# Altium PCB SensorNode.PcbDoc (part 2 of 2)
Units mil, origin at the board's own origin, x right, y up, seen from the top; angles counter-clockwise.
Board outline 2244.09 x 2204.72 mil, 4 copper layers (Top Copper, POWER, GND, Bottom Copper), stack 61.811 mil thick; 83 components, 70 nets, 369 pads, 414 vias.
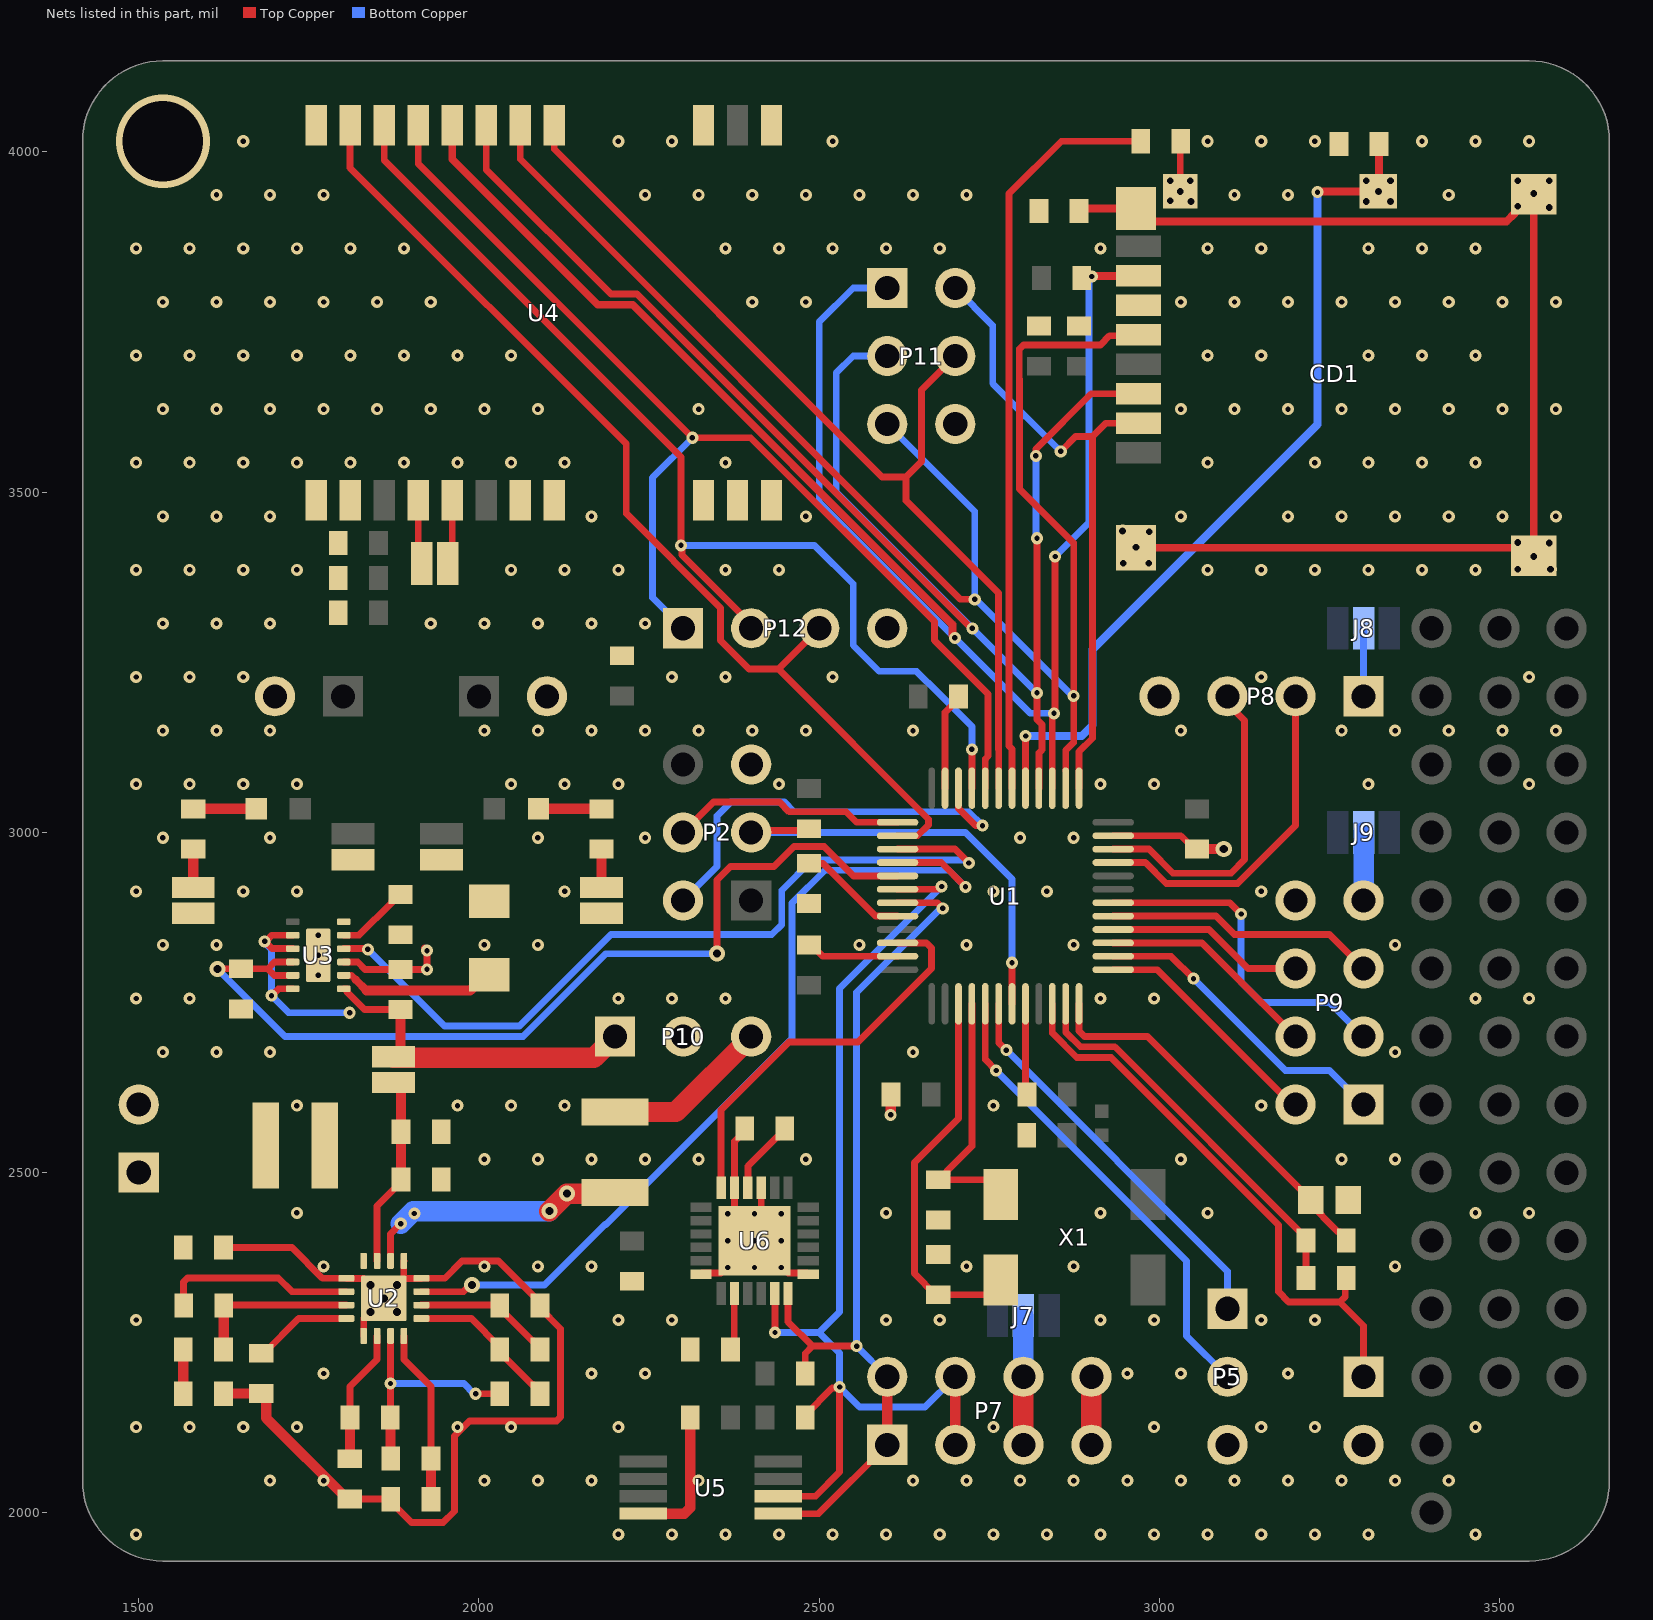
[diagram p4: the nets of this part, all layers, seen from the top]

## Via types
v1: diameter 17.72, hole 7.87, Top Copper to Bottom Copper, tented both sides, 344 vias
v2: diameter 19.68, hole 9.84, Top Copper to Bottom Copper, tented both sides, 25 vias
v3: diameter 23.62, hole 11.81, Top Copper to Bottom Copper, tented both sides, 22 vias
v4: diameter 19.68, hole 7.87, Top Copper to Bottom Copper, tented both sides, 12 vias
v5: diameter 19.68, hole 11.81, Top Copper to Bottom Copper, tented both sides, 5 vias
v6: diameter 137.8, hole 118.11, Top Copper to Bottom Copper, tented both sides, 4 vias
v7: diameter 39, hole 20, Top Copper to Bottom Copper, tented both sides, 1 vias
v8: diameter 30, hole 15, Top Copper to Bottom Copper, tented both sides, 1 vias

## Nets (pads, with @x,y where several pads share a name; then routed paths per layer and width w, separated by ;. In a path a pad name is that pad's centre, name@x,y a point inside that pad or via, vN(x,y) a via of type N, cw(c..) or ccw(c..) an arc to the next point about the centre after c; other vN are vias at no path point) (continued)
GND: C1.1 C2.1 C3.1 C4.1 C5.1 C6.1 C7.1 C8.1 C9.1 C10.1 C11.1 C12.1 C13.1 C14.1 C15.1 C16.1 C17.1 C18.1 C19.1 C20.1 C21.1 C22.1 C32.1 C33.1 CD1.6 J1.1 J2.1 P1.2 P2.5 P3.2 P4.2 P5.3 P6.2 P7.7 P7.8 P8.4 P9.8 P10.2 P11.6 P12.4 R2.1 R4.1 R6.1 R10.1 R12.1 R15.1 R18.1 R19.1 R22.1 U1.8 U1.23 U1.35 U1.47 U2.1 U2.5 U2.12 U2.13 U2.17@1860.12,2315.16 U3.3 U3.13 U4.1 U4.2 U4.3 U4.4 U4.5 U4.10 U4.11 U4.12 U4.20 U4.22 U5.4 U6.1 U6.9 U6.11 U6.18 U6.25 | length 3094.6
  Top Copper w10: C8.1@1624.53,2390 1725,2390 1770.32,2344.68 U2.1@1805,2344.68 1805.08,2344.61 1830.67,2344.61 v5(1840.43,2334.84) v5(1860.12,2315.16) ; U3.3@1801.16,2809.53 1801.24,2809.45 1821.81,2809.45 1832.6,2798.66 C11.1@1884.84,2798.66 v1(1923.66,2798.66) v1(1923.66,2826.34) v1@1920,2830 ; R10.1@1810,2020.47 1870,2020.47 R12.1@1870.47,2020 1870.47,2016.06 1900.92,1985.61 1947.37,1985.61 1964.09,2002.33 1964.09,2112.88 1986.21,2135 2114.14,2135 2120,2140.86 2120,2270.59 2089.53,2301.06 2089.53,2308.94 2028.46,2370 1975,2370 1949.68,2344.68 U2.12@1915.24,2344.68 1915.16,2344.61 U2.17@1889.57,2344.61 ; U2.5@1830.59,2260.04 1830.67,2260.12 1830.67,2285.71 v5(1840.43,2295.47) v5(1860.12,2315.16) ; U2.13@1889.65,2370.28 1889.57,2370.2 U2.17@1889.57,2344.61 ; U6.18@2326.26,2350.79 2328.06,2352.58 2355.61,2352.58 2403.03,2400 v4(2405,2400) ; C18.1@2390.47,2565 2390.47,2561.06 2375.47,2546.06 U6.11@2375.47,2477.76 2375.47,2429.53 v4(2405,2400) ; U6.9@2414.84,2477.76 2414.84,2409.84 v4(2405,2400) ; U6.1@2483.74,2350.79 2481.95,2352.58 2454.39,2352.58 2406.97,2400 v4(2405,2400) ; C33.1@2485,2834.53 2488.94,2834.53 2505.51,2817.95 U1.47@2615.12,2817.95 ; U1.35@2685,3065 2685,3176.54 2704.53,3196.06 C4.1@2704.53,3200 ; U1.8@2803.11,2748.07 2803.19,2747.99 C6.1@2803.19,2615 ; U1.23@2932.05,2995.12 3031.42,2995.12 3051.06,2975.47 C3.1@3055,2975.47 ; v5(1860.12,2315.16) v5(1879.8,2334.84) U2.17@1889.57,2344.61
  Top Copper w15: R4.1@1624.53,2175 1624.76,2175.24 1679.76,2175.24 C12.1@1680,2175.47 1681.06,2175.47 1687.34,2169.19 1687.34,2139.19 1806.06,2020.47 R10.1@1810,2020.47 ; U5.4@2241.18,1998.82 2301.69,1998.82 2310.47,2007.61 C17.1@2310.47,2145 ; v1(2605,2585) 2605,2614.53 C2.1@2605.47,2615 ; C6.1@2805.24,2612.95 2803.19,2615 C6.1@2805.47,2615 ; C3.1@3055,2975.47 v3(3094.53,2975.47) v3@3095,2975
  Top Copper w30: P7.7@2900,2100 P7.8@2900,2200
  other v1: 1496.06,1968.51 2204.73,1968.51 2283.47,1968.51 2362.21,1968.51 2440.95,1968.51 2519.69,1968.51 2598.43,1968.51 2677.17,1968.51 2755.91,1968.51 2834.65,1968.51 2913.39,1968.51 2992.13,1968.51 3070.87,1968.51 3149.61,1968.51 3228.35,1968.51 3307.09,1968.51 3464.57,1968.51 1692.91,2047.25 1771.65,2047.25 2007.88,2047.25 2086.62,2047.25 2165.36,2047.25 2322.84,2047.25 2637.8,2047.25 2716.54,2047.25 2795.28,2047.25 2874.02,2047.25 2952.76,2047.25 3031.5,2047.25 3110.24,2047.25 3188.98,2047.25 3267.72,2047.25 3346.46,2047.25 3425.2,2047.25 1496.06,2125.99 1574.8,2125.99 1653.54,2125.99 1732.28,2125.99 1968.51,2125.99 2047.25,2125.99 2204.73,2125.99 2755.91,2125.99 2992.13,2125.99 3149.61,2125.99 3228.35,2125.99 3464.57,2125.99 1771.65,2204.73 2165.36,2204.73 2244.1,2204.73 2952.76,2204.73 3031.5,2204.73 3188.98,2204.73 1496.06,2283.47 2204.73,2283.47 2283.47,2283.47 2598.43,2283.47 2677.17,2283.47 2913.39,2283.47 2992.13,2283.47 3149.61,2283.47 3228.35,2283.47 1771.65,2362.21 2007.88,2362.21 2086.62,2362.21 2165.36,2362.21 2716.54,2362.21 2874.02,2362.21 3346.46,2362.21 1732.28,2440.95 2598.43,2440.95 2913.39,2440.95 3070.87,2440.95 3464.57,2440.95 3543.31,2440.95 2007.88,2519.69 2086.62,2519.69 2165.36,2519.69 2244.1,2519.69 2322.84,2519.69 2480.32,2519.69 3031.5,2519.69 3267.72,2519.69 3346.46,2519.69 1732.28,2598.43 1968.51,2598.43 2047.25,2598.43 2125.99,2598.43 2755.91,2598.43 3149.61,2598.43 1535.43,2677.17 1614.17,2677.17 1692.91,2677.17 2637.8,2677.17 3346.46,2677.17 1496.06,2755.91 1574.8,2755.91 2204.73,2755.91 2283.47,2755.91 2362.21,2755.91 2913.39,2755.91 2992.13,2755.91 3464.57,2755.91 3543.31,2755.91 1535.43,2834.65 1614.17,2834.65 2007.88,2834.65 2086.62,2834.65 2559.06,2834.65 2716.54,2834.65 2874.02,2834.65 3346.46,2834.65 1496.06,2913.39 1653.54,2913.39 1732.28,2913.39 2125.99,2913.39 2755.91,2913.39 2834.65,2913.39 3149.61,2913.39 1535.43,2992.13 1692.91,2992.13 2086.62,2992.13 2244.1,2992.13 2795.28,2992.13 2874.02,2992.13 1496.06,3070.87 1574.8,3070.87 1653.54,3070.87 1732.28,3070.87 2047.25,3070.87 2125.99,3070.87 2204.73,3070.87 2440.95,3070.87 2913.39,3070.87 2992.13,3070.87 3307.09,3070.87 3543.31,3070.87 1535.43,3149.61 1614.17,3149.61 1692.91,3149.61 2007.88,3149.61 2086.62,3149.61 2165.36,3149.61 2244.1,3149.61 2322.84,3149.61 2401.58,3149.61 2480.32,3149.61 2637.8,3149.61 3031.5,3149.61 3267.72,3149.61 3346.46,3149.61 3425.2,3149.61 3503.94,3149.61 3582.68,3149.61 1496.06,3228.35 1574.8,3228.35 1653.54,3228.35 2283.47,3228.35 2362.21,3228.35 2519.69,3228.35 3149.61,3228.35 3543.31,3228.35 1535.43,3307.09 1614.17,3307.09 1692.91,3307.09 1929.13,3307.09 2007.88,3307.09 2086.62,3307.09 2165.36,3307.09 2244.1,3307.09 1496.06,3385.83 1574.8,3385.83 1653.54,3385.83 1732.28,3385.83 2047.25,3385.83 2125.99,3385.83 2204.73,3385.83 2362.21,3385.83 2440.95,3385.83 3070.87,3385.83 3149.61,3385.83 3228.35,3385.83 3307.09,3385.83 3385.83,3385.83 3464.57,3385.83 1535.43,3464.57 1614.17,3464.57 1692.91,3464.57 2165.36,3464.57 2480.32,3464.57 3031.5,3464.57 3188.98,3464.57 3267.72,3464.57 3346.46,3464.57 3425.2,3464.57 3503.94,3464.57 3582.68,3464.57 1496.06,3543.31 1574.8,3543.31 1653.54,3543.31 1732.28,3543.31 1811.02,3543.31 1889.76,3543.31 1968.51,3543.31 2047.25,3543.31 2125.99,3543.31 2362.21,3543.31 3070.87,3543.31 3228.35,3543.31 3307.09,3543.31 3385.83,3543.31 3464.57,3543.31 1535.43,3622.05 1614.17,3622.05 1692.91,3622.05 1771.65,3622.05 1850.39,3622.05 1929.13,3622.05 2007.88,3622.05 2086.62,3622.05 2322.84,3622.05 3031.5,3622.05 3110.24,3622.05 3188.98,3622.05 3267.72,3622.05 3346.46,3622.05 3425.2,3622.05 3503.94,3622.05 3582.68,3622.05 1496.06,3700.79 1574.8,3700.79 1653.54,3700.79 1732.28,3700.79 1811.02,3700.79 1889.76,3700.79 1968.51,3700.79 2047.25,3700.79 3070.87,3700.79 3149.61,3700.79 3307.09,3700.79 3385.83,3700.79 3464.57,3700.79 1535.43,3779.53 1614.17,3779.53 1692.91,3779.53 1771.65,3779.53 1850.39,3779.53 1929.13,3779.53 2401.58,3779.53 2480.32,3779.53 3031.5,3779.53 3110.24,3779.53 3188.98,3779.53 3267.72,3779.53 3346.46,3779.53 3425.2,3779.53 3503.94,3779.53 3582.68,3779.53 1496.06,3858.27 1574.8,3858.27 1653.54,3858.27 1732.28,3858.27 1811.02,3858.27 1889.76,3858.27 2362.21,3858.27 2440.95,3858.27 2519.69,3858.27 2598.43,3858.27 2677.17,3858.27 2913.39,3858.27 3070.87,3858.27 3149.61,3858.27 3307.09,3858.27 3385.83,3858.27 3464.57,3858.27 1614.17,3937.01 1692.91,3937.01 1771.65,3937.01 2244.1,3937.01 2322.84,3937.01 2401.58,3937.01 2480.32,3937.01 2559.06,3937.01 2637.8,3937.01 2716.54,3937.01 3110.24,3937.01 3188.98,3937.01 3425.2,3937.01 1653.54,4015.75 2204.73,4015.75 2283.47,4015.75 2519.69,4015.75 3070.87,4015.75 3149.61,4015.75 3228.35,4015.75 3385.83,4015.75 3464.57,4015.75 3543.31,4015.75
  other v4: 2365.63,2360.63 2405,2360.63 2444.37,2360.63 2365.63,2400 2444.37,2400 2365.63,2439.37 2405,2439.37 2444.37,2439.37 1763.76,2789.84 1763.76,2819.37 1763.76,2848.9
  other v5: 1879.8,2295.47
  other v6: 1535.43,4015.75
GPIO_0: P5.1 U1.6 | length 587.4
  Top Copper w10: U1.6@2763.74,2748.07 2763.74,2691.26 v1(2775,2680)
  Bottom Copper w10: v1(2775,2680) 3100,2355 P5.1@3100,2300
GPIO_1: P5.2 U1.5 | length 695.5
  Top Copper w10: U1.5@2744.06,2748.07 2744.06,2665.94 v1(2760,2650)
  Bottom Copper w10: v1(2760,2650) 3040,2370 3040,2260 P5.2@3100,2200
I2C_SCL: P7.3 P7.4 R23.1 U1.42 U5.6 U6.23 | length 1612.7
  Top Copper w10: U6.23@2434.53,2322.24 2435,2321.77 v1(2435,2265) ; U5.6@2440,2024.41 2494.41,2024.41 2530,2060 v1(2530,2185) ; R23.1@2479.53,2140 2479.53,2143.94 2519.11,2183.52 2528.52,2183.52 v1@2529.48,2184.48 ; U1.42@2615.12,2916.38 2675.83,2916.38 v1(2680,2920.55)
  Top Copper w15: P7.3@2700,2100 P7.4@2700,2200
  Bottom Copper w10: v1(2435,2265) 2500,2265 ; v1(2680,2920.55) 2530,2770.55 2530,2295 2500,2265 ; P7.4@2700,2200 2655.47,2155.47 2559.53,2155.47 v1(2530,2185) 2530,2235 2500,2265
I2C_SDA: P7.1 P7.2 R24.1 U1.43 U5.5 U6.24 | length 1334.6
  Top Copper w10: U5.5@2440,1998.82 2498.82,1998.82 P7.1@2600,2100 ; U6.24@2454.21,2322.24 2454.21,2280.79 2490,2245 ; R24.1@2479.53,2205 2479.53,2234.53 2490,2245 ; v1(2555,2245) 2490,2245 ; U1.43@2615.12,2896.69 2673.31,2896.69 2680,2890 v1(2681.59,2888.41)
  Top Copper w15: P7.1@2600,2100 P7.2@2600,2200
  Bottom Copper w10: P7.2@2600,2200 v1(2555,2245) 2555,2765 2678.41,2888.41 v1(2681.59,2888.41)
I2C_VCC: J7.2 P7.5 P7.6 | length 190
  Top Copper w30: P7.5@2800,2100 P7.6@2800,2200
  Bottom Copper w30: P7.6@2800,2200 J7.2@2800,2290
LORA_BUSY: P12.2 U1.33 U4.14 | length 1643.9
  Top Copper w10: U4.14@1860.63,4039.37 1860.63,3987.91 2296.87,3551.67 v1(2296.87,3421.87) 2298.35,3420.39 2298.35,3407.87 2400,3306.21 P12.2@2400,3300 ; U1.33@2724.37,3065 v1(2724.41,3122.05) v1(2724.41,3122.05)
  Bottom Copper w10: v1(2296.87,3421.87) 2493.13,3421.87 2550,3365 2550,3275 2588.23,3236.77 2643.23,3236.77 2675,3205 2724.41,3155.59 v1(2724.41,3122.05)
LORA_IRQ: P12.3 U1.38 U4.13 | length 1542.6
  Top Copper w10: U4.13@1810.63,4039.37 1810.63,3976.77 2216.54,3570.87 2216.54,3468.46 2355,3330 2355,3282.03 2397.03,3240 2440,3240 ; P12.3@2500,3300 2440,3240 ; U1.38@2615.12,2995.12 2644.72,2995.12 2660.66,3011.05 2660.66,3019.34 2440,3240
LORA_nCS: P11.4 U1.31 U4.19 | length 1472.9
  Top Copper w10: U4.19@2110.63,4039.37 2110.63,4004.37 2592.5,3522.5 2627.5,3522.5 ; P11.4@2700,3700 2650.31,3650.31 2650.31,3545.31 2627.5,3522.5 ; U1.31@2763.74,3065 2763.74,3121.23 2763.27,3121.7 2763.27,3351.73 2627.5,3487.5 2627.5,3522.5
LORA_nRST: P12.1 U1.32 U4.15 | length 1696
  Top Copper w10: U4.15@1910.63,4039.37 1910.63,3983.01 v1(2313.64,3580) 2398.94,3580 2669.29,3309.65 2669.29,3282.29 2748.27,3203.31 2748.27,3112.16 2744.06,3107.95 U1.32@2744.06,3065
  Bottom Copper w10: P12.1@2300,3300 2255,3345 2255,3521.36 v1(2313.64,3580)
NetC7_2: C7.2 J5.1 L1.2 U3.5 | length 110.1
  Top Copper w10: U3.5@1801.16,2848.9 1823.9,2848.9 1872.13,2897.13 1872.13,2899.88 1880.91,2908.66 C7.2@1884.84,2908.66
NetC9_2: C9.2 C10.2 J4.1 U2.15 | length 262.8
  Top Copper w10: U2.15@1850.28,2370.28 1850.28,2450.87 1885.47,2486.06 C9.2@1885.47,2490
  Top Copper w15: C9.2@1885.47,2490 C10.2@1885.47,2560 J4.1@1885.47,2618.51
NetC12_2: C12.2 U2.4 | length 146.2
  Top Copper w10: C12.2@1680,2234.53 1683.94,2234.53 1735.04,2285.63 U2.4@1805,2285.63
NetC18_2: C18.2 U6.10 | length 111.4
  Top Copper w10: U6.10@2395.16,2477.76 2395.16,2509.49 2437.95,2552.28 2440.75,2552.28 2449.53,2561.06 C18.2@2449.53,2565
NetC19_2: C19.2 U6.20 | length 84.7
  Top Copper w10: C19.2@2369.53,2240 2375,2245.47 2375,2321.77 U6.20@2375.47,2322.24
NetC21_2: C21.2 U1.3 X1.1 | length 572.4
  Top Copper w10: U1.3@2704.68,2748.07 2704.68,2579.68 2640,2515 2640,2351.54 2671.06,2320.47 C21.2@2675,2320.47 2746.14,2320.47 2766.73,2341.06 X1.1@2766.73,2342.01
NetC22_2: C22.2 U1.4 X1.4 | length 378.6
  Top Copper w10: C22.2@2675,2489.53 C22.2@2678.94,2489.53 ; U1.4@2724.37,2748.07 2724.37,2538.9 2687.72,2502.24 2687.72,2498.31 C22.2@2678.94,2489.53 ; X1.4@2766.73,2467.99 2766.73,2468.94 2746.14,2489.53 C22.2@2678.94,2489.53
NetCD1_9: CD1.9 R17.2 | length 74
  Top Copper w10: CD1.9@3030.51,3942.13 3030.51,4014.76 R17.2@3031.5,4015.75
  other v2: 3046.26,3927.17 3015.75,3928.15 3030.51,3941.93 3015.75,3957.68 3045.28,3957.68
NetCD1_10: CD1.10 R19.2 U1.29 | length 1262.1
  Top Copper w10: U1.29@2803.11,3065 v1@2803.15,3136.77
  Top Copper w11.55: v1@2803.15,3136.77 2803.39,3137.01 v1(2803.39,3141.77) ; v1(3232.28,3940.94) 3233.46,3942.13 CD1.10@3321.85,3942.13 3322.83,3943.11 R19.2@3322.83,4011.81
  Bottom Copper w11.55: v1(2803.39,3141.77) 2885.87,3141.77 2901.57,3157.48 2901.57,3268.7 3232.28,3599.41 v1(3232.28,3940.94)
  other v2: 3304.13,3927.17 3339.57,3927.17 3321.85,3941.93 3304.13,3957.68 3339.57,3957.68
NetCD1_11: CD1.11 CD1.12 CD1.13 CD1.14 R18.2 | length 1817.7
  Top Copper w11.55: R18.2@2881.89,3913.39 2885.24,3916.73 CD1.14@2965.55,3916.73 2984.65,3897.64 3509.84,3897.64 3522.51,3910.3 3522.51,3914.24 3546.26,3937.99 CD1.11@3550.2,3937.99 CD1.12@3550.2,3406.5 3538.39,3418.31 CD1.13@2965.55,3418.31
  other v2: 3526.57,3386.81 3574.8,3386.81 2946.85,3395.67 2984.25,3395.67 3550.2,3405.51 2965.55,3419.29 3572.83,3425.2 3526.57,3426.18 2985.24,3441.93 2945.87,3442.91 3572.83,3918.31 3526.57,3920.28 3550.2,3938.98 3526.57,3957.68 3572.83,3957.68
NetD1_1: D1.1 R13.2 | length 92.7
  Top Copper w15: R13.2@1580,3034.53 1580.24,3034.76 1672.28,3034.76 D1.1@1672.52,3035
NetD2_1: D2.1 R14.2 | length 92.7
  Top Copper w15: D2.1@2087.48,3035 2087.72,3034.76 2179.76,3034.76 R14.2@2180,3034.53
NetF1_1: F1.1 P10.3 | length 246
  Top Copper w30: F1.1@2200,2589.06 2289.06,2589.06 P10.3@2400,2700
NetJ1_2: J1.2 R13.1 | length 56.5
  Top Copper w15: J1.2@1580,2919 R13.1@1580,2975.47
NetJ2_2: J2.2 R14.1 | length 56.5
  Top Copper w15: J2.2@2180,2919 R14.1@2180,2975.47
NetJ3_1: J3.1 U4.8 | length 84.8
  Top Copper w10: J3.1@1910.63,3403.44 U4.8@1910.63,3488.19
NetJ3_2: J3.2 U4.7 | length 95.9
  Top Copper w10: J3.2@1954,3395 1960.63,3401.63 U4.7@1960.63,3488.19
NetJ6_1: J6.1 U3.6
NetJ8_2: J8.2 P8.1 | length 100
  Bottom Copper w10: P8.1@3300,3200 J8.2@3300,3300
NetJ9_2: J9.2 P9.7 | length 100
  Bottom Copper w30: P9.7@3300,2900 J9.2@3300,3000
NetL1_1: L1.1 U3.2 | length 232.6
  Top Copper w10: U3.2@1801.16,2789.84 1812.52,2789.84 1818.9,2783.46
  Top Copper w12: 1818.9,2783.46 1834.65,2767.72
  Top Copper w15: 1834.65,2767.72 1986.93,2767.72 2010.08,2790.87 L1.1@2015,2790.87
NetL2_2: L2.2 U2.16
NetP1_1: P1.1 R20.1 U1.10 | length 850.1
  Top Copper w10: U1.10@2842.48,2748.07 2842.56,2747.99 2842.56,2705.02 2878.48,2669.1 2929.1,2669.1 3175,2423.2 3175,2325 3190,2310 3265,2310 ; R20.1@3274.53,2345 3273.14,2343.61 3273.14,2318.14 3265,2310 ; P1.1@3300,2200 3300,2275 3265,2310
NetP8_2: P8.2 U1.21 | length 505.9
  Top Copper w10: U1.21@2932.05,2955.75 2979.25,2955.75 3010,2925 3115,2925 3200,3010 P8.2@3200,3200
NetP8_3: P8.3 U1.22 | length 466.3
  Top Copper w10: U1.22@2932.05,2975.43 2984.57,2975.43 3020,2940 3105,2940 3125,2960 3125,3164.61 3100,3189.61 P8.3@3100,3200
NetP9_1: P9.1 U1.14 | length 458.2
  Top Copper w10: U1.14@2932.05,2817.95 3017.05,2817.95 v1(3050,2785)
  Bottom Copper w10: v1(3050,2785) 3185,2650 3250,2650 P9.1@3300,2600
NetP9_2: P9.2 U1.13 | length 350.1
  Top Copper w10: U1.13@2932.05,2798.27 2996.73,2798.27 3195,2600 P9.2@3200,2600
NetP9_3: P9.3 U1.18 | length 508
  Top Copper w10: U1.18@2932.05,2896.69 3103.31,2896.69 v1(3120,2880)
  Bottom Copper w10: v1(3120,2880) 3120,2780 3150,2750 3250,2750 P9.3@3300,2700
NetP9_4: P9.4 U1.15 | length 325
  Top Copper w10: U1.15@2932.05,2837.64 3062.36,2837.64 P9.4@3200,2700
NetP9_5: P9.5 U1.17 | length 399.9
  Top Copper w10: U1.17@2932.05,2877.01 3082.99,2877.01 3110,2850 3250,2850 P9.5@3300,2800
NetP9_6: P9.6 U1.16 | length 291.7
  Top Copper w10: U1.16@2932.05,2857.32 3072.68,2857.32 3130,2800 P9.6@3200,2800
NetR2_2: R2.2 U1.44 | length 162.2
  Top Copper w10: R2.2@2485,2954.53 2505.47,2954.53 2582.91,2877.09 2615.04,2877.09 U1.44@2615.12,2877.01
NetR3_1: R3.1 R5.2 U2.3 | length 245.3
  Top Copper w10: R3.1@1625,2305 1625.31,2305.31 U2.3@1805,2305.31
  Top Copper w15: R5.2@1624.53,2240 1624.76,2240.24 1624.76,2304.76 R3.1@1625,2305
NetR4_2: R4.2 R5.1 | length 65
  Top Copper w15: R4.2@1565.47,2175 R5.1@1565.47,2240
NetR6_2: R6.2 U1.41 U3.10 U3.11 | length 1394.6
  Top Copper w10: v3@1615,2800 v3(1615.47,2799.53) R6.2@1650,2799.53 1689.53,2799.53 ; U3.10@1721.52,2809.55 1699.55,2809.55 1689.53,2799.53 ; U3.10@1721.54,2809.53 U3.10@1726.36,2809.53 ; U3.11@1726.36,2789.84 1699.21,2789.84 1689.53,2799.53 ; v3(2350,2821.75) 2350,2930.27 2369.73,2950 2433.42,2950 2462.73,2979.31 2507.27,2979.31 2550.52,2936.06 U1.41@2615.12,2936.06
  Bottom Copper w10: v3(1615.47,2799.53) 1715,2700 2065,2700 2186.75,2821.75 v3(2350,2821.75)
NetR7_2: R7.2 R8.2 R9.2 U2.7 | length 347.3
  Top Copper w10: R7.2@1869.53,2140 1869.88,2140.35 1869.88,2259.96 U2.7@1869.96,2260.04 ; v1(1995,2175) R8.2@2030.47,2175
  Top Copper w15: R7.2@1869.53,2140 1870,2139.53 1870,2080.47 R9.2@1870.47,2080
  Bottom Copper w10: v1(1870,2190) 1977.91,2190 1992.91,2175 v1(1995,2175)
NetR17_1: R17.1 U1.30 | length 1101
  Top Copper w10: U1.30@2783.43,3065 2783.43,3122.76 2779.12,3127.06 2779.12,3939.12 2855.75,4015.75 R17.1@2972.44,4015.75
NetR20_2: R20.2 R21.2 U1.11 | length 553.5
  Top Copper w10: U1.11@2862.24,2722.56 2862.24,2706.54 2883.79,2685 2934.41,2685 3215.47,2403.94 R21.2@3215.47,2400 R20.2@3215.47,2345
NetR21_1: R21.1 R22.2 U1.12 | length 558.8
  Top Copper w10: U1.12@2881.85,2748.07 2881.85,2708.15 2890,2700 2982.44,2700 3206.77,2475.67 3208.74,2475.67 R22.2@3217.44,2466.97 ; R22.2@3217.44,2458.03 3262.76,2412.72 3265.75,2412.72 3274.53,2403.94 R21.1@3274.53,2400
NetU1_39: U1.39 U3.4 | length 1211.5
  Top Copper w10: U3.4@1801.16,2829.21 1834.21,2829.21 1835.35,2828.07 v1(1836.72,2828.07) ; U1.39@2615.12,2975.43 2699.57,2975.43 v1(2720,2955)
  Bottom Copper w10: v1(1836.72,2828.07) 1949.19,2715.61 2059.39,2715.61 2193.79,2850 2430.27,2850 2445,2864.73 2445,2915 2489.41,2959.41 2715.59,2959.41 v1(2720,2955)
NetU1_40: U1.40 U2.11 | length 1297.8
  Top Copper w10: U2.11@1915.24,2325 1977.33,2325 1987.33,2335 v3(1990,2335) ; U1.40@2615.12,2955.75 2615.2,2955.67 2679.33,2955.67 v1(2715,2920)
  Bottom Copper w10: v3(1990,2335) 2096.26,2335 2185.12,2423.86 2186.83,2423.86 2460,2697.03 2460,2896.21 2508.2,2944.41 2690.59,2944.41 v1(2715,2920)
NetU1_46: U1.46 U6.12 | length 592.9
  Top Copper w10: U6.12@2355.79,2477.76 2355.79,2540.83 2355.69,2540.93 2355.69,2592.27 2455.39,2691.97 2556.93,2691.97 2665,2800.04 2665,2830 2657.44,2837.56 2615.2,2837.56 U1.46@2615.12,2837.64
NRST: P2.3 R1.2 U1.7 | length 684.8
  Top Copper w10: P2.3@2400,3000 2402.74,3002.74 2482.26,3002.74 R1.2@2485,3005.47 ; U1.7@2783.43,2748.07 v1(2783.43,2808.43) v1@2785,2810
  Bottom Copper w10: P2.3@2400,3000 2715,3000 2783.43,2931.57 v1(2783.43,2808.43)
OK_HYST: R8.1 R11.2 U2.9 | length 227
  Top Copper w10: U2.9@1915.24,2285.63 1988.78,2285.63 2030.47,2243.94 R11.2@2030.47,2240 2030.47,2236.06 2078.82,2187.72 2080.75,2187.72 2089.53,2178.94 R8.1@2089.53,2175
OK_PROG: R11.1 R15.2 U2.10 | length 206
  Top Copper w10: U2.10@1915.24,2305.31 2030.16,2305.31 R15.2@2030.47,2305 2030.47,2301.06 2078.82,2252.72 2080.75,2252.72 2089.53,2243.94 R11.1@2089.53,2240
SD_nCS: CD1.2 P11.2 U1.25 | length 960.2
  Top Copper w10: v1(2855,3560) 2876.63,3581.63 2901.57,3581.63 ; U1.25@2881.85,3065 2881.85,3118.67 2901.57,3138.4 2901.57,3581.63 ; CD1.2@2969.09,3601.38 2921.33,3601.38 2901.57,3581.63
  Bottom Copper w10: P11.2@2700,3800 2755,3745 2755,3660 v1(2855,3560)
Solar_Panel: C8.2 L2.1 P4.1 R3.2 U2.2 | length 283.9
  Top Copper w10: R3.2@1565.94,2305 1565.94,2339.14 1571.8,2345 1705,2345 1725,2325 U2.2@1805,2325
SPI2_MISO: CD1.7 P11.1 R16.1 U1.27 U4.16 | length 2794.7
  Top Copper w10: U1.27@2842.48,3065 2842.48,3170.39 2845,3172.91 v1(2845,3175) ; v1(2846.65,3405.51) v1(2846.65,3405.51) v1@2846.69,3172.48
  Top Copper w11.55: U4.16@1960.63,4039.37 1960.63,3989.37 2174.57,3775.43 2225.82,3775.43 2695.67,3305.58 2695.67,3289.65 v1(2699.35,3285.97) ; v1@2900.59,3817.91 CD1.7@2969.09,3817.91
  Bottom Copper w10: P11.1@2600,3800 2550,3800 2500,3750 2500,3485.32 v1(2699.35,3285.97) 2810.32,3175 v1(2845,3175) ; v1(2846.65,3405.51) 2896.65,3455.51 2896.65,3812.99 v1(2900.59,3816.93)
SPI2_MOSI: CD1.3 P11.3 U1.28 U4.17 | length 2424.5
  Top Copper w10: U4.17@2010.63,4039.37 2010.63,3974.37 2193.79,3791.21 2232.35,3791.21 2711.45,3312.11 2723.56,3300 v1(2725,3300) ; v1(2818.39,3553.34) 2818.39,3563.39 2899.68,3644.68 CD1.3@2969.09,3644.68 ; v1(2820,3432.3) 2820,3165.82 2827.24,3158.57 2827.24,3121.44 2822.8,3116.99 U1.28@2822.8,3065
  Bottom Copper w10: P11.3@2600,3700 2550,3700 2525,3675 2525,3500 v1(2725,3300) v1(2820,3205) ; v1(2818.39,3553.34) 2818.39,3433.91 v1(2820,3432.3)
SPI2_SCLK: CD1.5 P11.5 U1.26 U4.18 | length 2342.2
  Top Copper w10: U4.18@2060.63,4039.37 2060.63,3989.37 2707.48,3342.52 v1(2728.58,3342.52) ; U1.26@2862.24,3090.51 2862.24,3120.28 2874.01,3132.05 2874.01,3425.2 2794.53,3504.69 2794.53,3666.29 2794.12,3666.7 2794.12,3710.27 2800.39,3716.54 2913.39,3716.54 2926.88,3730.03 2967.83,3730.03 CD1.5@2969.09,3731.3
  Bottom Copper w10: P11.5@2600,3600 2728.58,3471.42 v1(2728.58,3342.52) 2730.43,3342.52 2872.17,3200.78 v1(2874.01,3200.78)
SWCLK: P2.4 U1.37 | length 345.9
  Top Copper w10: P2.4@2300,3000 2344.53,3044.53 2441.64,3044.53 2455.89,3030.28 2539.72,3030.28 2555.2,3014.8 U1.37@2615.12,3014.8
SWDIO: P2.2 U1.34 | length 633.2
  Top Copper w10: U1.34@2704.68,3065 2704.68,3035.32 2730,3010 v1(2740,3010)
  Bottom Copper w10: P2.2@2300,2900 2350,2950 2350,3024.42 2370.11,3044.53 2448.89,3044.53 2463.14,3030.28 2719.72,3030.28 v1(2740,3010)
VBAT: F1.2 U2.14 | length 395
  Top Copper w10: U2.14@1869.96,2370.28 1869.96,2409.96 v1(1885,2425)
  Top Copper w30: v3(2103.52,2443.52) v3(2129.2,2469.2) 2198.26,2469.2 F1.2@2200,2470.94
  Bottom Copper w30: v1(1885,2425) 1903.52,2443.52 v3(2103.52,2443.52)
  other v1: 1905,2440
VBAT_OV: R7.1 R10.2 U2.6 | length 196.9
  Top Copper w10: R7.1@1810.47,2140 1810.47,2185.47 1850.28,2225.28 U2.6@1850.28,2260.04
  Top Copper w15: R10.2@1810,2079.53 1810.24,2079.76 R7.1@1810.24,2139.76
VBAT_UV: R9.1 R12.2 U2.8 | length 256.6
  Top Copper w10: U2.8@1889.65,2260.04 1889.65,2225.35 1929.53,2185.47 R9.1@1929.53,2080
  Top Copper w15: R12.2@1929.53,2020 R9.1@1929.53,2080
VSTOR: C11.2 J4.2 P10.1 U3.1 U3.8 U3.9 U3.12 | length 840.6
  Top Copper w10: v1(1695,2760) 1705.16,2770.16 U3.12@1726.36,2770.16 ; U3.9@1726.36,2829.21 1695.79,2829.21 1687.09,2837.91 1687.09,2840 1695.99,2848.9 U3.8@1726.36,2848.9 ; U3.1@1801.16,2770.16 1805.93,2770.16 1806,2770.08 1806,2765.32 1831.71,2739.61 C11.2@1884.84,2739.61
  Top Copper w15: C11.2@1884.84,2739.61 1884.84,2669.16 J4.2@1885,2669
  Top Copper w30: J4.2@1875,2669 1885,2669 2169,2669 P10.1@2200,2700
  Bottom Copper w10: v1(1685,2840) 1685,2837.91 1695,2827.91 v1(1695,2760) 1720,2735 v1(1810,2735)
pads on no net: CD1.1 CD1.8 P2.6 U1.2 U1.19 U1.20 U1.45 U2.17@1860.12,2315.16 U3.7 U4.6 U5.1 U5.2 U5.3 U5.7 U6.2 U6.3 U6.4 U6.5 U6.6 U6.7 U6.14 U6.15 U6.16 U6.17 U6.19 U6.21 U6.22 X1.2 X1.3
copper on no net:
  other v6: 1535.43,2047.24 3543.31,2047.24 2677.17,4015.75

## Polygon pours and split planes (outlines as drawn)
GND on Top Copper "NONET_L-01_P-001" (solid, pour order 42): 1417.32,4133.86 1417.32,1929.13 3661.42,1929.13 3661.42,4133.86
Solar_Panel on Top Copper "SOLAR_PANEL_L01_P002" (solid, pour order 2): 1465,2315 1460,2320 1460,2605 1705,2605 1705,2390 1725,2390 1780,2335 1820,2335 1820,2315
no net on Top Copper "NONET_L-01_P-001" (solid, pour order 37): 2586.61,3250
ANT on Top Copper "ANT_L01_P035" (solid, pour order 35): 2395.67,4075 2395.67,4122.05 2364.17,4122.05 2364.17,4075
GND on Top Copper "GND_L01_P034" (solid, pour order 34): 2445.87,4009.84 2445.87,4122.05 2414.37,4122.05 2414.37,4009.84
GND on Top Copper "GND_L01_P032" (solid, pour order 32): 2345.47,4009.84 2345.47,4122.05 2313.98,4122.05 2313.98,4009.84
3V_AUX on Top Copper "3V_AUX_L01_P030" (solid, pour order 30): 1850,3050 1780,3050 1780,3232.76 1846.46,3299.21 1846.46,3515.75 1874.02,3515.75 1874.02,3074.02
GND on Top Copper "GND_L01_P000" (solid, pour order 0): 1859.74,2870 1854.23,2865.77 1854.23,2830 1845,2815 1834.08,2814.92 1821.68,2815 1821.68,2802.51 1844.19,2780 1940,2780 1945,2785 1945,2865 1940,2870
3V_AUX on POWER "NONET_L-01_P-001" (solid, pour order 40): 1417.32,3444.88 2480.32,3444.88 2480.31,4133.86 3650.59,4133.86 3650.59,1929.13 1417.32,1929.13
GND on POWER "NONET_L-01_P-001" (solid, pour order 38): 2480.32,3444.88 1417.32,3444.88 1417.32,4133.86 2480.32,4133.86
3V on POWER "NONET_L-01_P-001" (solid, pour order 36): 2385,2535 2355,2565 2355,2945 1896.77,2945 1895.67,2943.9 1895.67,3088.58 2032.09,3225 2893.11,3225 3058.07,3060.04 3058.07,2569.88 3023.19,2535
no net on POWER "NONET_L-01_P-001" (solid, pour order 39): 1428.54,3444.88
no net on POWER "NONET_L02_P011" (solid, pour order 11): 1415,4375
GND on GND "NONET_L-01_P-001" (solid, pour order 41): 1417.32,4133.86 1417.32,1929.13 3650.59,1929.13 3650.59,4133.86
GND on Bottom Copper "NONET_L-01_P-001" (solid, pour order 43): 1428.15,4134.41 1428.15,1929.68 3655.39,1929.68 3655.39,4134.41

## Keep-outs
Keep-Out Layer:
  the board outline again, w10

## Other copper
Top Copper:
  region net 3V: 1910,3071.42 1914.37,3075.79 1976.38,3075.79 1980,3072.17 1980,2983 1910,2983
  region: 2045,2875
  region net NetC9_2: 1845,2445 1875,2445 1905,2475 1905,2645 1845,2645
  region net VSTOR: 1795,2660 1800,2655 1910,2655 1910,2750 1830,2750 1806,2774 1806,2775 1795,2775
  region net 3V_AUX: 1845,3055 1850,3050 1850,2983 1780,2983 1780,3050 1785,3055
  region net NetL2_2: 1815,2600 1835,2580 1835,2360 1825,2360 1755,2430 1755,2600
  region net NetJ6_1: 1790,2865 1790,2925 1780,2935 1780,2975 1850,2975 1850,2895 1820,2865
  pour cut-out: 1895,2350 1935,2390 2115,2390 2135,2370 2135,1975 1530,1975 1530,2315 1895,2315
  region net NetC7_2: 2045,2975 2050,2970 2050,2875 1875,2875 1860,2890 1860,2970 1865,2975

## Silkscreen, mask and mechanical layers (free items; w line width, h text height)
Top Overlay:
  lines w6: 1795,3130 1795,3140 ; 3190,2025 3190,2200 3230,2200
  text "MI" at 2491,3786 h32
  text "S" at 2766,3786 h32
  text "JLCJLCJLCJLC" at 1814.07,3728.44 h32
  text "MO" at 2486,3686 h32
  text "L" at 2766,3686 h32
  text "SCK" at 2556,3501 h32
  text "GND" at 2666,3501 h32
  text "BSY" at 2356,3391 h32
  text "GND" at 2561,3391 h32
  text "RST" at 2256,3371 h32
  text "NC" at 2031,3366 h32
  text "G" at 2126,3366 h32
  text "IRQ" at 2461,3366 h32
  text "SWCLK" at 1936,3316 h32
  text "NRST" at 2121,3316 h32
  text "SWDIO" at 1936,3266 h32
  text "NC" at 2126,3266 h32
  text "PS9888 Team 16 / Sensor Node V1" at 1617.13,3123.03 h55 r90
  text "G" at 2986,3101 h32
  text "RX" at 3071,3101 h32
  text "TX" at 3171,3101 h32
  text "VCC" at 3256,3101 h32
  text "3V" at 1976,3096 h32
  text "3V_AUX" at 1656,3091.33 h32
  text "G" at 2996,2896 h32
  text "VCC" at 3051,2896 h32
  text "MI" at 2986,2781 h32
  text "MO" at 3081,2781 h32
  text "VSTOR" at 2176,2766 h32
  text "SCK" at 2941,2686 h32
  text "CS3" at 3051,2686 h32
  text "VBAT" at 2466.63,2683.17 h32
  text "Solar" at 1446.94,2667.42 h32
  text "G" at 2291,2601 h32
  text "CS2" at 2941,2581 h32
  text "CS1" at 3056,2581 h32
  text "-" at 1576.93,2570.56 h60
  text "PTC" at 2304,2486 h32 r90
  text "+" at 1576.93,2468.51 h60
  text "G" at 3206,2081 h32
  text "SDA" at 2551,1996 h32
  text "VCC" at 2756,1996 h32
  text "SCL" at 2661,1981 h32
  text "GND" at 2861,1981 h32
  text "ANALOG IN" at 3071,1971 h32
Bottom Overlay:
  lines w6: 3335,3065 3345,3065 3345,3045
  text "MISO" at 2529,3786 h32
  text "SD_CS" at 2919,3776.33 h32
  text "MOSI" at 2539,3686 h32
  text "LORA_CS" at 2984,3686.33 h32
  text "SCLK" at 2534,3586 h32
  text "GND" at 2849,3586 h32
  text "BSY" at 2439,3391 h32
  text "GND" at 2644,3391 h32
  text "RST" at 2334,3371 h32
  text "IRQ" at 2539,3366 h32
  text "3V" at 3246,3356 h32 r270
  text "3V_AUX" at 3326.33,3356 h32 r270
  text "3V_AUX" at 1839,3276.33 h32
  text "PS9888 2020 / Team 16: / Ridz / Cheryl / Kae / Justin / Isaac" at 2215,3267.08 h60
  text "GND" at 2254,3186 h32
  text "G" at 3009,3101 h32
  text "RX" at 3124,3101 h32
  text "TX" at 3229,3101 h32
  text "VCC" at 3339,3101 h32
  text "GND" at 1734,3096 h32
  text "3V" at 2029,3096 h32
  text "GND" at 2144,3096 h32
  text "NC" at 2214,3086 h32
  text "G" at 2504,3086 h32
  text "3V_AUX" at 3319,3051.33 h32
  text "SWCLK" at 2214,2986 h32
  text "NRST" at 2599,2981 h32
  text "3V" at 3229,2951 h32
  text "G" at 3019,2896 h32
  text "VCC" at 3134,2896 h32
  text "SWDIO" at 2219,2886 h32
  text "NC" at 2539,2886 h32
  text "MISO" at 2989,2801 h32
  text "MOSI" at 3134,2801 h32
  text "VSTOR" at 2224,2766 h32
  text "GND" at 2344,2766 h32
  text "VBAT" at 2494,2766 h32
  text "SCK" at 3024,2686 h32
  text "CS3" at 3134,2686 h32
  text "Solar" at 1584,2671 h32
  text "-" at 1576.93,2629.44 h60 r180
  text "CS2" at 3024,2581 h32
  text "CS1" at 3129,2581 h32
  text "+" at 1576.93,2531.49 h60 r180
  text "3V_AUX" at 2719,2316.33 h32
  text "3V" at 2929,2311 h32
  text "G0" at 3024,2286 h32
  text "ANALOG IN" at 3286,2266 h32 r270
  text "G1" at 3024,2181 h32
  text "GND" at 3234,2086 h32
  text "SDA" at 2639,1996 h32
  text "VCC" at 2839,1996 h32
  text "SCL" at 2744,1981 h32
  text "GND" at 2949,1981 h32
Top Mask:
  region: 2414.37,4122.05 2414.37,4072.83 2445.87,4072.83 2445.87,4122.05
  region: 2364.17,4122.05 2364.17,4072.83 2395.67,4072.83 2395.67,4122.05
  region: 2345.47,4072.83 2313.98,4072.83 2313.98,4122.05 2345.47,4122.05
Bottom Mask:
  region: 1781.5,2862.2 1746.06,2862.2 1746.06,2776.57 1781.5,2776.57
  region: 1893.7,2348.43 1893.7,2281.5 1826.77,2281.5 1826.77,2348.43

## Text inside footprints (layer, text, board x,y; h text height)
P2: Top Overlay "6" at 2320,3160 h32 r90; Top Overlay "5" at 2420,3160 h32 r90; Top Overlay "2" at 2315,2815 h32 r90; Top Overlay "1" at 2420,2820 h32 r90
P7: Top Overlay "8" at 2960,2180 h32; Top Overlay "7" at 2960,2080 h32; Top Overlay "1" at 2520,2080 h32; Top Overlay "2" at 2510,2210 h32
P9: Top Overlay "2" at 3220,2510 h32 r90; Top Overlay "1" at 3320,2520 h32 r90; Top Overlay "7" at 3320,2960 h32 r90; Top Overlay "8" at 3220,2960 h32 r90
P11: Top Overlay "6" at 2765,3615 h32 r270; Top Overlay "5" at 2500,3615 h32 r270; Top Overlay "2" at 2685,3890 h32 r270; Top Overlay "1" at 2580,3880 h32 r270